# Altium PCB Cabinet_Device.PcbDoc (part 2 of 4)
Units mil, origin at the board's own origin, x right, y up, seen from the top; angles counter-clockwise.
Board outline 17790 x 10695 mil, 4 copper layers (Top Layer, Ground, Internal Plane 1, Bottom Layer), stack 30.634 mil thick; 515 components, 346 nets, 1467 pads, 176 vias.
Unrouted connection lines stored in the file: 677.
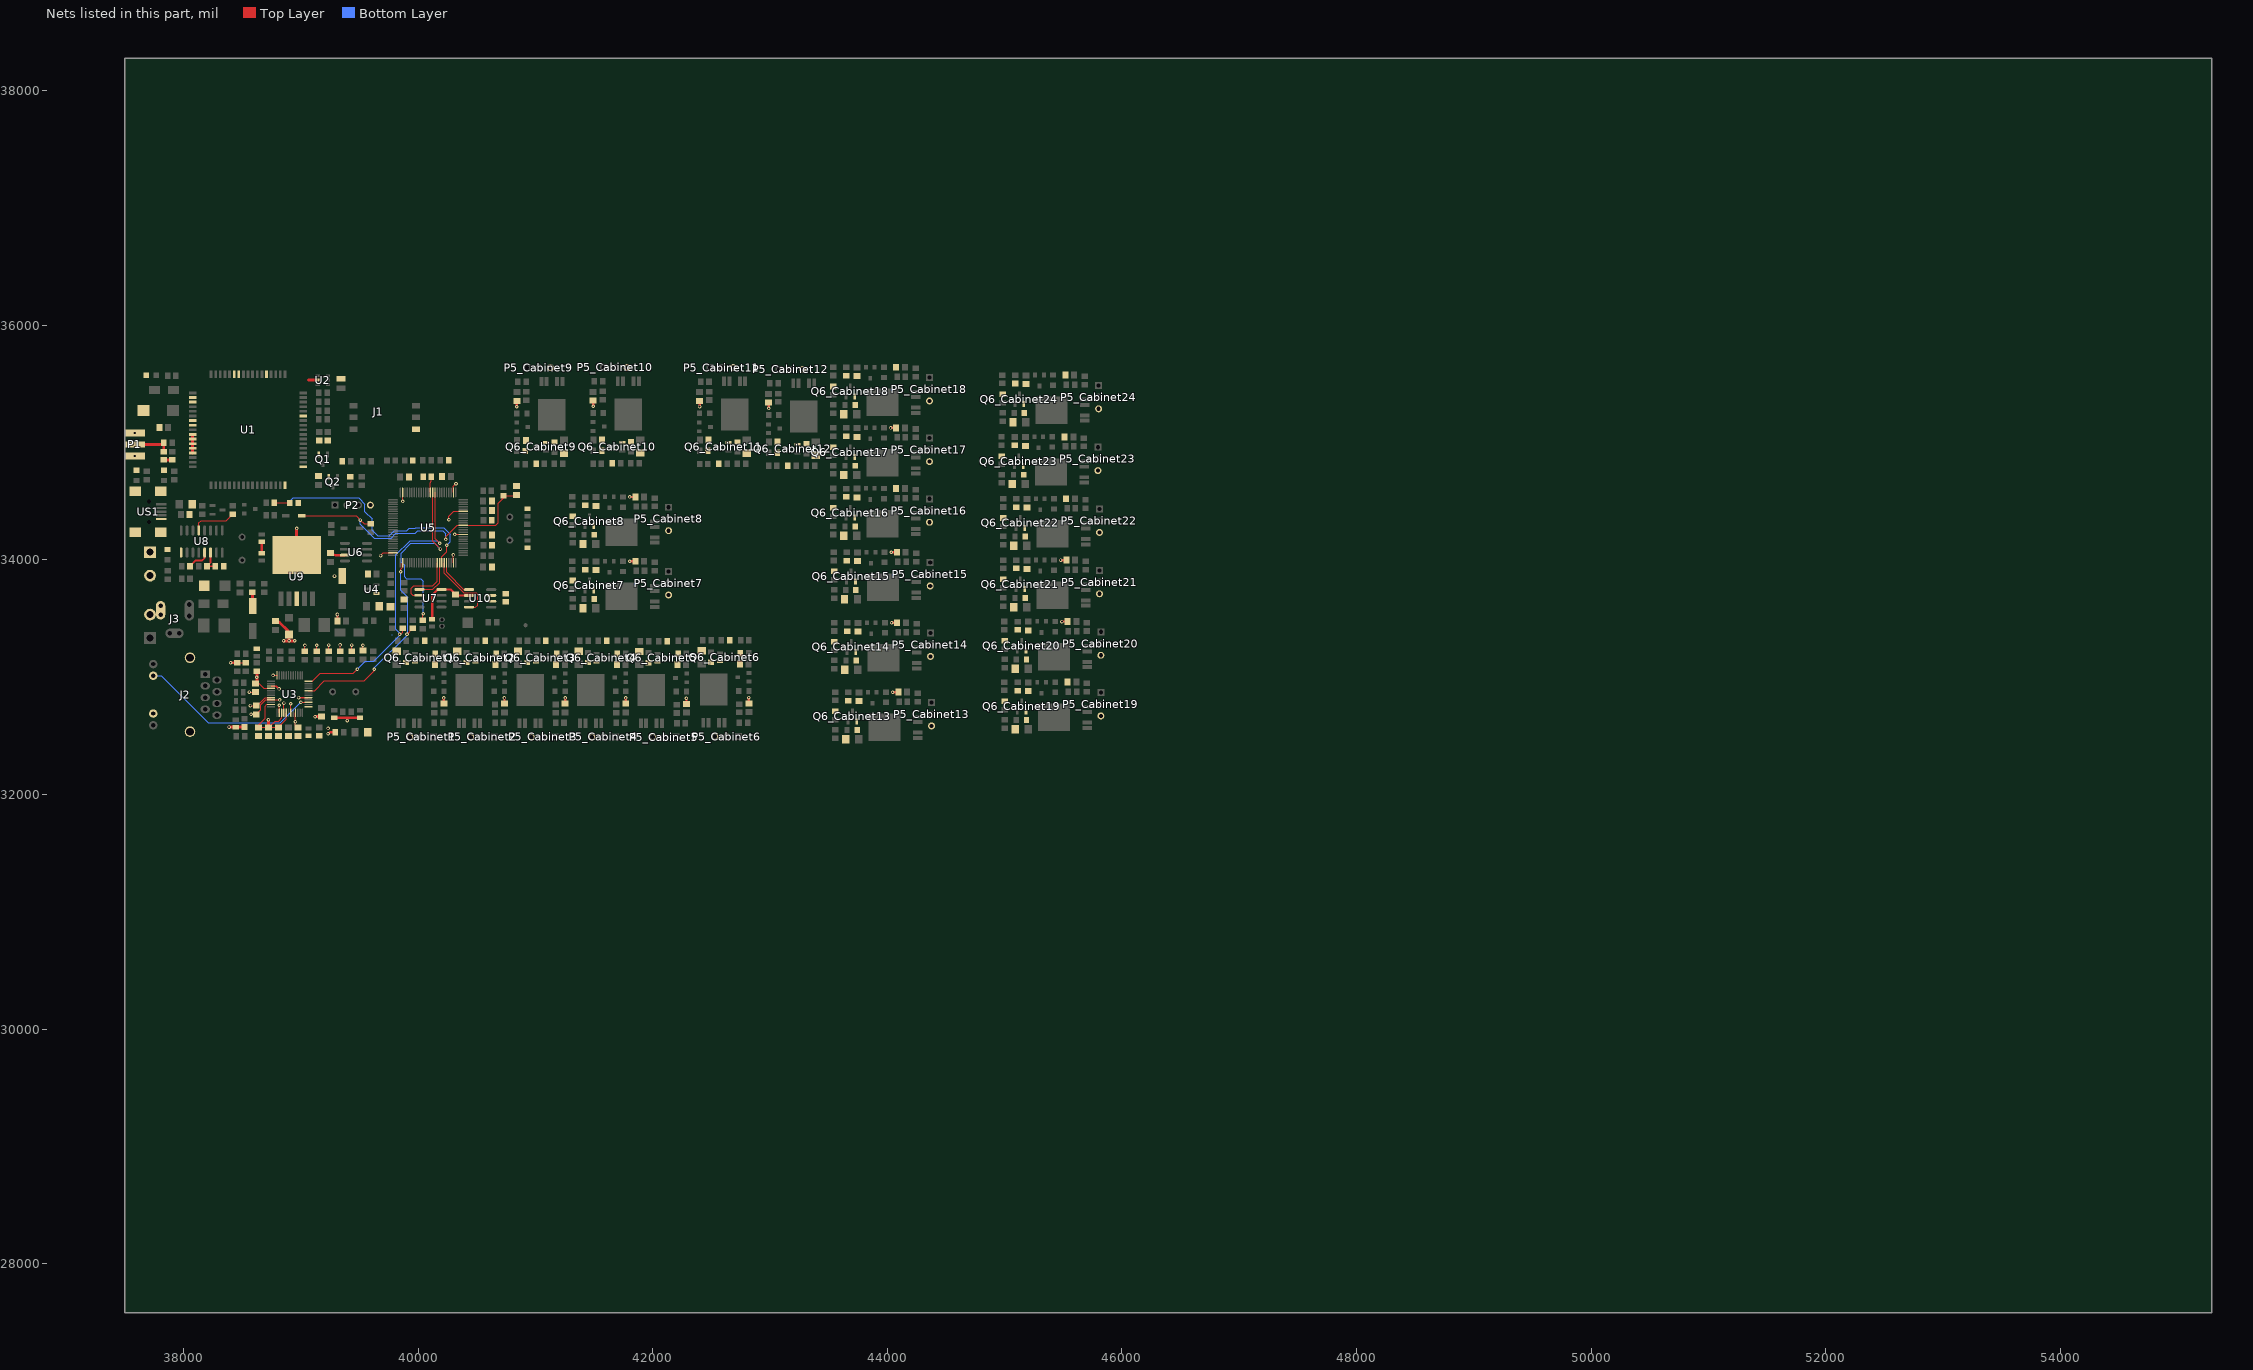
[diagram p4: the nets of this part, all layers, seen from the top]

## Components (designator, comment, footprint, x,y, rotation, side; value= is the part's Value field where it differs from the comment) (continued)
R62_Cabinet12 "1K 1% 0805(2012)" 2012[0805]R 43345,34803.51 r0 top (schematic designator R62)
R62_Cabinet13 "1K 1% 0805(2012)" 2012[0805]R 43558.02,32514.76 r270 top (schematic designator R62)
R62_Cabinet14 "1K 1% 0805(2012)" 2012[0805]R 43549,33107 r270 top (schematic designator R62)
R62_Cabinet15 "1K 1% 0805(2012)" 2012[0805]R 43546.51,33708 r270 top (schematic designator R62)
R62_Cabinet16 "1K 1% 0805(2012)" 2012[0805]R 43540.51,34251 r270 top (schematic designator R62)
R62_Cabinet17 "1K 1% 0805(2012)" 2012[0805]R 43540.51,34768 r270 top (schematic designator R62)
R62_Cabinet18 "1K 1% 0805(2012)" 2012[0805]R 43540.51,35285 r270 top (schematic designator R62)
R62_Cabinet19 "1K 1% 0805(2012)" 2012[0805]R 45001.51,32600 r270 top (schematic designator R62)
R62_Cabinet20 "1K 1% 0805(2012)" 2012[0805]R 45001.51,33117 r270 top (schematic designator R62)
R62_Cabinet21 "1K 1% 0805(2012)" 2012[0805]R 44990,33641 r270 top (schematic designator R62)
R62_Cabinet22 "1K 1% 0805(2012)" 2012[0805]R 44989.51,34164 r270 top (schematic designator R62)
R62_Cabinet23 "1K 1% 0805(2012)" 2012[0805]R 44976.51,34691 r270 top (schematic designator R62)
R62_Cabinet24 "1K 1% 0805(2012)" 2012[0805]R 44982.51,35218 r270 top (schematic designator R62)
R63_Cabinet1 "10K 1% 0805(2012)" 2012[0805]R 40020,33309 r180 top (schematic designator R63)
R63_Cabinet2 "10K 1% 0805(2012)" 2012[0805]R 40537,33309 r180 top (schematic designator R63)
R63_Cabinet3 "10K 1% 0805(2012)" 2012[0805]R 41054,33309 r180 top (schematic designator R63)
R63_Cabinet4 "10K 1% 0805(2012)" 2012[0805]R 41571,33309 r180 top (schematic designator R63)
R63_Cabinet5 "10K 1% 0805(2012)" 2012[0805]R 42088,33307.49 r180 top (schematic designator R63)
R63_Cabinet6 "10K 1% 0805(2012)" 2012[0805]R 42620,33312.49 r180 top (schematic designator R63)
R63_Cabinet7 "10K 1% 0805(2012)" 2012[0805]R 41316.51,33788 r270 top (schematic designator R63)
R63_Cabinet8 "10K 1% 0805(2012)" 2012[0805]R 41316.51,34336 r270 top (schematic designator R63)
R63_Cabinet9 "10K 1% 0805(2012)" 2012[0805]R 41041,34818.51 r0 top (schematic designator R63)
R63_Cabinet10 "10K 1% 0805(2012)" 2012[0805]R 41692,34821.51 r0 top (schematic designator R63)
R63_Cabinet11 "10K 1% 0805(2012)" 2012[0805]R 42599,34819.51 r0 top (schematic designator R63)
R63_Cabinet12 "10K 1% 0805(2012)" 2012[0805]R 43188,34803.51 r0 top (schematic designator R63)
R63_Cabinet13 "10K 1% 0805(2012)" 2012[0805]R 43558.02,32671.76 r270 top (schematic designator R63)
R63_Cabinet14 "10K 1% 0805(2012)" 2012[0805]R 43549,33264 r270 top (schematic designator R63)
R63_Cabinet15 "10K 1% 0805(2012)" 2012[0805]R 43546.51,33865 r270 top (schematic designator R63)
R63_Cabinet16 "10K 1% 0805(2012)" 2012[0805]R 43540.51,34408 r270 top (schematic designator R63)
R63_Cabinet17 "10K 1% 0805(2012)" 2012[0805]R 43540.51,34925 r270 top (schematic designator R63)
R63_Cabinet18 "10K 1% 0805(2012)" 2012[0805]R 43540.51,35442 r270 top (schematic designator R63)
R63_Cabinet19 "10K 1% 0805(2012)" 2012[0805]R 45001.51,32757 r270 top (schematic designator R63)
R63_Cabinet20 "10K 1% 0805(2012)" 2012[0805]R 45001.51,33274 r270 top (schematic designator R63)
R63_Cabinet21 "10K 1% 0805(2012)" 2012[0805]R 44990,33798 r270 top (schematic designator R63)
R63_Cabinet22 "10K 1% 0805(2012)" 2012[0805]R 44989.51,34321 r270 top (schematic designator R63)
R63_Cabinet23 "10K 1% 0805(2012)" 2012[0805]R 44976.51,34848 r270 top (schematic designator R63)
R63_Cabinet24 "10K 1% 0805(2012)" 2012[0805]R 44982.51,35375 r270 top (schematic designator R63)
TP1 "TP" TP 40917,33442 r90 top
U1 "SIM900" GSM_900A 38550,35107.91 r90 top
U2 "SMS05CT1G" ONSC-TSOP-6-318G-02_V 39188,35532 r0 top
U3 "W5500" LQFP48_N 38905.43,32855 r0 top
U4 "AS1360-33-T" SOT23_N 39605,33750 r90 top
U5 "STM32F103VET6TR" STM-LQFP100_M 40085,34275 r180 top
U6 "MAX706TESA" SOIC8_N 39470,34065 r0 top
U7 "PCF8563" SOIC8_N 40105,33672 r180 top
U8 "CH340G" SOIC16_N 38155,34156 r90 top
U9 "LM2596S-5.0" TS5B_N 38965,33905 r90 top
U10 "TJA1051T/3" SOIC8_N 40529,33671 r0 top
U11_Cabinet1 "BTS6143D" INF-PG-TO252-5-11_M 39920.43,32796.51 r90 top (schematic designator U11)
U11_Cabinet2 "BTS6143D" INF-PG-TO252-5-11_M 40437.43,32796.51 r90 top (schematic designator U11)
U11_Cabinet3 "BTS6143D" INF-PG-TO252-5-11_M 40954.43,32796.51 r90 top (schematic designator U11)
U11_Cabinet4 "BTS6143D" INF-PG-TO252-5-11_M 41471.43,32796.51 r90 top (schematic designator U11)
U11_Cabinet5 "BTS6143D" INF-PG-TO252-5-11_M 41988.43,32795 r90 top (schematic designator U11)
U11_Cabinet6 "BTS6143D" INF-PG-TO252-5-11_M 42520.43,32800 r90 top (schematic designator U11)
U11_Cabinet7 "BTS6143D" INF-PG-TO252-5-11_M 41829,33688.43 r180 top (schematic designator U11)
U11_Cabinet8 "BTS6143D" INF-PG-TO252-5-11_M 41829,34236.43 r180 top (schematic designator U11)
U11_Cabinet9 "BTS6143D" INF-PG-TO252-5-11_M 41140.57,35331 r270 top (schematic designator U11)
U11_Cabinet10 "BTS6143D" INF-PG-TO252-5-11_M 41791.57,35334 r270 top (schematic designator U11)
U11_Cabinet11 "BTS6143D" INF-PG-TO252-5-11_M 42698.57,35332 r270 top (schematic designator U11)
U11_Cabinet12 "BTS6143D" INF-PG-TO252-5-11_M 43287.57,35316 r270 top (schematic designator U11)
U11_Cabinet13 "BTS6143D" INF-PG-TO252-5-11_M 44070.51,32572.2 r180 top (schematic designator U11)
U11_Cabinet14 "BTS6143D" INF-PG-TO252-5-11_M 44061.49,33164.43 r180 top (schematic designator U11)
U11_Cabinet15 "BTS6143D" INF-PG-TO252-5-11_M 44059,33765.43 r180 top (schematic designator U11)
U11_Cabinet16 "BTS6143D" INF-PG-TO252-5-11_M 44053,34308.43 r180 top (schematic designator U11)
U11_Cabinet17 "BTS6143D" INF-PG-TO252-5-11_M 44053,34825.43 r180 top (schematic designator U11)
U11_Cabinet18 "BTS6143D" INF-PG-TO252-5-11_M 44053,35342.43 r180 top (schematic designator U11)
U11_Cabinet19 "BTS6143D" INF-PG-TO252-5-11_M 45514,32657.43 r180 top (schematic designator U11)
U11_Cabinet20 "BTS6143D" INF-PG-TO252-5-11_M 45514,33174.43 r180 top (schematic designator U11)
U11_Cabinet21 "BTS6143D" INF-PG-TO252-5-11_M 45502.49,33698.43 r180 top (schematic designator U11)
U11_Cabinet22 "BTS6143D" INF-PG-TO252-5-11_M 45502,34221.43 r180 top (schematic designator U11)
U11_Cabinet23 "BTS6143D" INF-PG-TO252-5-11_M 45489,34748.43 r180 top (schematic designator U11)
U11_Cabinet24 "BTS6143D" INF-PG-TO252-5-11_M 45495,35275.43 r180 top (schematic designator U11)
US1 "USB-B" USB/SM0.8-6H5 37500,34410 r180 top
X1 "32.768KHz" XTAL32 40203,33490 r0 top
Y1 "8MHz" XTAL_HC-49 39370,32875 r0 top
Y2 "8MHz" XTAL_HC-49 40782,34266 r90 top
Y3 "12MHz" XTAL_HC-49 38500,34095 r90 top

## Footprints (in the part's own frame and the unit in brackets; to place one, negate y for a bottom-side part, rotate by r counter-clockwise, add the part's x,y. Pads: shape width x height; smd on the part's side, far side on the other; paste and mask are expansions set on the pad)
2EDGR-5.08-2P [mil]
  rect 100x100 hole 60: 1(0,0)
  round 100 hole 60: 2(200,0)
  silkscreen extent -100,-415 300,63
0805LED [mil]
  rect 45x50 smd: 1(-43.5,0) 2(43.5,0)
  silkscreen extent -5,-20 10,20, body extent -41,-18 41,18, height 33
2012[0805] [mm] "Chip  Body 2.0x1.3mm, IPC Medium Density"
  rect 1.2x1.4 smd: 1(-0.9,0) 2(0.9,0)
  body extent -1.07,-0.7 1.07,0.7, height 0.65
2012[0805]06CD [mm] "Chip Capacitor; Body 2.0 x 1.2 mm (LxW typ)"
  rect 1.3x1.5 smd: 1(-0.95,0) 2(0.95,0)
  silkscreen extent -2.16,-0.64 -2.16,0.63, body extent -1.51,-0.7 1.49,0.7, height 0.53
2012[0805]13CD [mm] "Chip Capacitor; Body 2.0 x 1.2 mm (LxW typ)"
  rect 1.3x1.5 smd: 1(-0.95,0) 2(0.95,0)
  silkscreen extent -1.9,-0.65 -1.9,0.65
2012[0805]100_L [mm] "Chip Capacitor, Body 2.0x1.2mm, Height 1.0mm, IPC High Density"
  rect 0.95x1.35 smd: 1(-0.8,0) 2(0.8,0)
  silkscreen extent -0.05,-0.58 0.05,0.58, body extent -1.1,-0.72 1.1,0.72, height 1
2012[0805]R [mm] "Chip Resistor, Body 2.0x1.3mm, IPC Medium Density"
  rect 1.2x1.4 smd: 1(-0.9,0) 2(0.9,0)
  silkscreen extent 0,-0.6 0,0.6, body extent -1.07,-0.7 1.07,0.7, height 0.65
2012[0805]RL [mm] "Chip Resistor, Body 2.0x1.3mm, IPC Medium Density"
  rect 1.2x1.4 smd: 1(-0.9,0) 2(0.9,0)
  silkscreen extent -0.1,-0.6 0.1,0.6, body extent -1.07,-0.7 1.07,0.7, height 0.65
3216[1206]CB [mm]
  rect 1.6x1.8 smd: 1(-1.4,0) 2(1.4,0)
  silkscreen extent -0.3,-0.8 0.3,0.8, body extent -2.1,-0.9 2.1,0.9, height 0.95
7343[2917]CT [mm] "Capacitor, SM Tantalum; Body 7.3 x 4.3 mm (LxW typ)"
  rect 2.6x2.4 smd: 1(-3.2,0) 2(3.2,0)
  silkscreen extent -4.58,-2.3 3.8,2.42
DO-214AA/SMB [mm] "DO-214-AA/SMB; 2 C-Bend Leads; Body 5.3 x 3.6 mm, inc. leads (LxW)"
  rect 2.3x2.3 smd: 1(-2.25,0) 2(2.25,0)
  silkscreen extent -2.16,-1.8 2.16,1.78, body extent -2.7,-1.8 2.7,1.8, height 2.27
DO-214AC/SMA [mm] "DO-214-AC/SMA; 2 C-Bend Leads; Body 5 x 2.7 mm, inc. leads (LxW)"
  rect 2.4x1.8 smd: 1(-2.05,0) 2(2.05,0)
  silkscreen extent -1.91,-1.27 1.91,1.27, body extent -2.6,-1.3 2.6,1.3, height 2.38
GSM_900A [mm]
  rect 1.6x0.6 smd: 1(-12,8) 2(-12,7) 3(-12,6) 4(-12,5) 5(-12,4) 6(-12,3) 7(-12,2) 8(-12,1) 9(-12,0) 10(-12,-1) 11(-12,-2) 12(-12,-3) 13(-12,-4) 14(-12,-5) 15(-12,-6) 16(-12,-7) 17(-12,-8) 35(12,-8) 36(12,-7) 37(12,-6) 38(12,-5) 39(12,-4) 40(12,-3) 41(12,-2) 42(12,-1) 43(12,0) 44(12,1) 45(12,2) 46(12,3) 47(12,4) 48(12,5) 49(12,6) 50(12,7) 51(12,8)
  rect 0.6x1.6 smd: 18(-8,-12) 19(-7,-12) 20(-6,-12) 21(-5,-12) 22(-4,-12) 23(-3,-12) 24(-2,-12) 25(-1,-12) 26(0,-12) 27(1,-12) 28(2,-12) 29(3,-12) 30(4,-12) 31(5,-12) 32(6,-12) 33(7,-12) 34(8,-12) 52(8,12) 53(7,12) 54(6,12) 55(5,12) 56(4,12) 57(3,12) 58(2,12) 59(1,12) 60(0,12) 61(-1,12) 62(-2,12) 63(-3,12) 64(-4,12) 65(-5,12) 66(-6,12) 67(-7,12) 68(-8,12)
  silkscreen extent -13.75,-12 12,12
HDR1X3 [mm] "Connector; Header; 3 Position"
  rect 1.5x1.5 hole 0.9: 1(0,0)
  round 1.5 hole 0.9: 2(2.54,0) 3(5.08,0)
  silkscreen extent -1.27,-1.27 6.35,1.27
HDR1X4 [mm] "Connector; Header; 4 Position"
  rect 1.5x1.5 hole 0.9: 1(0,0)
  round 1.5 hole 0.9: 2(2.54,0) 3(5.08,0) 4(7.62,0)
  silkscreen extent -1.27,-1.27 8.89,1.27
HR911105A [mil] "HR911105A"
  rect 80x62 hole 40: 1(-429,-159)
  oval 80x62 hole 40: 2(-529,-109) 3(-429,-59) 4(-529,-9) 5(-429,41) 6(-529,91) 7(-429,141) 8(-529,191)
  round 72 hole 36: 9(13.91,-244.63) 10(13.91,-145) 11(13.91,176.87) 12(13.91,277)
  round 90 hole 65: 13(-299.08,331.16) 13(-299.08,-298.76)
  Multi-Layer circle w5: c-169,-209 r70.8
  Multi-Layer circle w5: c-169,241 r70.8
  silkscreen extent -608,-299 258,331
INDP5050X28N [mm]
  rect 2.5x3 smd: 1(-2.2,0) 2(2.2,0)
  silkscreen extent -2.6,-2.6 2.6,2.6, body extent -1.56,-1.53 1.51,1.54, height 2
INF-PG-TO252-5-11_M [mm] "DPAK, 5-Leads, Body 6.5x6.12mm, Pitch 1.14mm, IPC Low Density"
  rect 2.05x0.85 smd: 1(-4.8,2.28) 2(-4.8,1.14) 4(-4.8,-1.14) 5(-4.8,-2.28)
  rect 6.9x5.95 smd: 3(2.4,0)
  silkscreen extent -4.92,-3.35 -1.45,3.38, body extent -2.05,-3.32 4.17,3.32, height 2.35
KLD-0202 [mm] "DC Power Jack, 2.5mm, KLD Series, PCB Mount"
  oval 2x4.5 all layers, no hole: 1(13.7,0)
  round 1.5 hole 1: 1A(13.7,-1.25) 1B(13.7,1.25) 2A(7.5,-1) 2B(7.5,1) 3A(9.5,-5) 3B(11.5,-5)
  oval 2x4 all layers, no hole: 2(7.5,0)
  oval 4x2 all layers, no hole: 3(10.5,-5)
  silkscreen extent 0,-4.5 14.6,4.5
LQFP48_N [mm] "Thin QFP, 48-Leads, Body 7x7mm, Pitch 0.5mm, IPC Medium Density"
  oval 1.8x0.3 smd: 1(-4.05,2.75) 2(-4.05,2.25) 3(-4.05,1.75) 4(-4.05,1.25) 5(-4.05,0.75) 6(-4.05,0.25) 7(-4.05,-0.25) 8(-4.05,-0.75) 9(-4.05,-1.25) 10(-4.05,-1.75) 11(-4.05,-2.25) 12(-4.05,-2.75) 25(4.05,-2.75) 26(4.05,-2.25) 27(4.05,-1.75) 28(4.05,-1.25) 29(4.05,-0.75) 30(4.05,-0.25) 31(4.05,0.25) 32(4.05,0.75) 33(4.05,1.25) 34(4.05,1.75) 35(4.05,2.25) 36(4.05,2.75)
  oval 0.3x1.8 smd: 13(-2.75,-4.05) 14(-2.25,-4.05) 15(-1.75,-4.05) 16(-1.25,-4.05) 17(-0.75,-4.05) 18(-0.25,-4.05) 19(0.25,-4.05) 20(0.75,-4.05) 21(1.25,-4.05) 22(1.75,-4.05) 23(2.25,-4.05) 24(2.75,-4.05) 37(2.75,4.05) 38(2.25,4.05) 39(1.75,4.05) 40(1.25,4.05) 41(0.75,4.05) 42(0.25,4.05) 43(-0.25,4.05) 44(-0.75,4.05) 45(-1.25,4.05) 46(-1.75,4.05) 47(-2.25,4.05) 48(-2.75,4.05)
  silkscreen extent -4.17,-2.75 2.75,3.57, body extent -3.5,-3.5 3.5,3.5, height 1.6
NIC-CAPA2-6.3X5.8_V [mm] "Aluminum Electrolytic Capacitor, Diameter 6.3mm, Height 6.1mm, Pitch 5.4mm"
  rect 3.5x1.6 smd: 1(-2.7,0) 2(2.7,0)
  silkscreen extent -3.4,-3.4 3.4,3.4, body extent -3.14,-3.12 3.14,3.15, height 6.1
NIC-CAPA2-6.3X7.7_V [mm] "Aluminum Electrolytic Capacitor, Diameter 6.3mm, Height 8mm, Pitch 5.4mm"
  rect 3.5x1.6 smd: 1(-2.7,0) 2(2.7,0)
  silkscreen extent -3.4,-3.4 3.4,3.4, body extent -3.14,-3.12 3.14,3.15, height 8
ONSC-TSOP-6-318G-02_V [mm] "SOP, 6-Leads, Body 3x1.5mm, Pitch 0.95mm"
  rect 0.95x0.6 smd: 1(-1.125,0.95) 2(-1.125,0) 3(-1.125,-0.95) 4(1.125,-0.95) 5(1.125,0) 6(1.125,0.95)
  silkscreen extent -1.25,-1.5 0.25,1.92, body extent -0.75,-1.5 0.75,1.5, height 1.1
Power-2P [mil]
  rect 100x100 hole 60: 1(0,0)
  round 100 hole 60: 2(200,0)
  silkscreen extent -100,-63 300,63
SIM_MUP-C745 [mm]
  rect 1.2x1.7 smd: 1(0,0) 2(2.54,0) 3(5.08,0) 5(0,-13.5) 6(2.54,-13.5) 7(5.08,-13.5)
  oval 1.2x1.7 on Top Overlay: 3(-3.429,1.397)
  rect 1.2x2 smd: 4(8.88,2.75) 8(10.88,2.75)
  silkscreen extent -4.5,-22.75 12.32,3.3
SMA-2 [mm]
  rect 4.5x1.2 smd: 1(0,0)
  rect 4.5x1.524 hole 0.5: 2(0,-2.5) 2(0,2.5)
  silkscreen extent -11.8,-3.3 -2.3,3.3
SOD123 [mm] "SOD-123; 2 Leads; Body 2.7 x 1.6 mm, (LxW)"
  rect 1.6x0.8 smd: 1(-1.7,0) 2(1.7,0)
  silkscreen extent -1.45,-0.85 1.45,0.85
SOIC8_N [mm] "SOIC, 8-Leads, Body 4.9x3.9mm, Pitch 1.27mm, IPC Medium Density"
  oval 2.2x0.6 smd: 1(-2.4,1.905) 2(-2.4,0.635) 3(-2.4,-0.635) 4(-2.4,-1.905) 5(2.4,-1.905) 6(2.4,-0.635) 7(2.4,0.635) 8(2.4,1.905)
  silkscreen extent -2.52,-2.5 0.9,2.88, body extent -3,-2.45 3,2.45, height 1.7
SOIC16_N [mm] "SOIC, 16-Leads, Body 9.9x3.9mm, Pitch 1.27mm, IPC Medium Density"
  oval 2.2x0.6 smd: 1(-2.4,4.445) 2(-2.4,3.175) 3(-2.4,1.905) 4(-2.4,0.635) 5(-2.4,-0.635) 6(-2.4,-1.905) 7(-2.4,-3.175) 8(-2.4,-4.445) 9(2.4,-4.445) 10(2.4,-3.175) 11(2.4,-1.905) 12(2.4,-0.635) 13(2.4,0.635) 14(2.4,1.905) 15(2.4,3.175) 16(2.4,4.445)
  silkscreen extent -2.52,-5 0.9,5.42, body extent -2,-5 2,5, height 1.75
SOT23_N [mm] "SOT23, 3-Leads, Body 2.9x1.3mm, Pitch 0.95mm, Lead Span 2.3mm, IPC Medium Density"
  rect 0.6x1.3 smd: 1(-0.95,-1.05) 2(0.95,-1.05) 3(0,1.05)
  silkscreen extent -1.93,-1.17 1.5,0.7, body extent -1.5,-0.7 1.5,0.7, height 1.1
SOT23B_N [mm] "SOT-23; 3 Leads; Body 3.0 x 2.5 mm, inc. leads (LxW max)"
  rect 0.85x1 smd: 1(-0.95,-1.2) 2(0.95,-1.2) 3(0,1.2)
  silkscreen extent -2.05,-1.32 1.28,1.2
STM-LQFP100_M [mm] "Thin QFP, 100-Leads, Body 14x14mm, Pitch 0.5mm, IPC Low Density"
  oval 2.1x0.3 smd: 1(-7.6,6) 2(-7.6,5.5) 3(-7.6,5) 4(-7.6,4.5) 5(-7.6,4) 6(-7.6,3.5) 7(-7.6,3) 8(-7.6,2.5) 9(-7.6,2) 10(-7.6,1.5) 11(-7.6,1) 12(-7.6,0.5) 13(-7.6,0) 14(-7.6,-0.5) 15(-7.6,-1) 16(-7.6,-1.5) 17(-7.6,-2) 18(-7.6,-2.5) 19(-7.6,-3) 20(-7.6,-3.5) 21(-7.6,-4) 22(-7.6,-4.5) 23(-7.6,-5) 24(-7.6,-5.5) 25(-7.6,-6) 51(7.6,-6) 52(7.6,-5.5) 53(7.6,-5) 54(7.6,-4.5) 55(7.6,-4) 56(7.6,-3.5) 57(7.6,-3) 58(7.6,-2.5) 59(7.6,-2) 60(7.6,-1.5) 61(7.6,-1) 62(7.6,-0.5) 63(7.6,0) 64(7.6,0.5) 65(7.6,1) 66(7.6,1.5) 67(7.6,2) 68(7.6,2.5) 69(7.6,3) 70(7.6,3.5) 71(7.6,4) 72(7.6,4.5) 73(7.6,5) 74(7.6,5.5) 75(7.6,6)
  oval 0.3x2.1 smd: 26(-6,-7.6) 27(-5.5,-7.6) 28(-5,-7.6) 29(-4.5,-7.6) 30(-4,-7.6) 31(-3.5,-7.6) 32(-3,-7.6) 33(-2.5,-7.6) 34(-2,-7.6) 35(-1.5,-7.6) 36(-1,-7.6) 37(-0.5,-7.6) 38(0,-7.6) 39(0.5,-7.6) 40(1,-7.6) 41(1.5,-7.6) 42(2,-7.6) 43(2.5,-7.6) 44(3,-7.6) 45(3.5,-7.6) 46(4,-7.6) 47(4.5,-7.6) 48(5,-7.6) 49(5.5,-7.6) 50(6,-7.6) 76(6,7.6) 77(5.5,7.6) 78(5,7.6) 79(4.5,7.6) 80(4,7.6) 81(3.5,7.6) 82(3,7.6) 83(2.5,7.6) 84(2,7.6) 85(1.5,7.6) 86(1,7.6) 87(0.5,7.6) 88(0,7.6) 89(-0.5,7.6) 90(-1,7.6) 91(-1.5,7.6) 92(-2,7.6) 93(-2.5,7.6) 94(-3,7.6) 95(-3.5,7.6) 96(-4,7.6) 97(-4.5,7.6) 98(-5,7.6) 99(-5.5,7.6) 100(-6,7.6)
  silkscreen extent -7.73,-6.15 6.15,6.82, body extent -7,-7 7,7, height 1.6
TP [mil] "Test Point 30mil-35mil"
  round 35 smd: 1(0,0)
TS5B_N [mm]
  rect 3.2x1.05 smd: 1(-6,3.4) 2(-6,1.7) 3(-6,0) 4(-6,-1.7) 5(-6,-3.4)
  rect 8.3x10.45 smd: 6(3.45,0)
  silkscreen extent -6.12,-5.2 -1.1,5.2, body extent -3.35,-5.2 6.05,5.2, height 4.65
USB/SM0.8-6H5 [mm] "Connector; USB2.0, Type B, SM; 5 Position; Right Angle"
  rect 2.3x0.5 smd: 1(-7.85,-1.6) 2(-7.85,-0.8) 3(-7.85,0) 4(-7.85,0.8) 5(-7.85,1.6)
  rect 2.5x2 smd: MH1(-7.75,4.45) MH2(-2.25,4.45) MH3(-7.75,-4.45) MH4(-2.25,-4.45)
  round 0.6 hole 0.9 unplated: ""(-5.25,-2.2) ""(-5.25,2.2)
  silkscreen extent -9.68,-4.95 0.7,4.95, body extent -8.9,-4.95 0.7,4.95, height 3.9
VISH-DO-214AC-2_V [mm] "SMA, 2-Leads, Body 4.245x2.665mm, Height 2.29mm"
  rect 1.7x1.68 smd: 1(-1.79,0) 2(1.79,0)
  silkscreen extent -2.12,-1.33 2.12,2.06, body extent -2.57,-1.33 2.57,1.33, height 2.29
XTAL32 [mil]
  oval 50x40 hole 28: 1(0,0) 2(0,-56)
  rect 92.13x86 smd: ""(220,-27)
  silkscreen extent -28,-77 264,25
XTAL_HC-49 [mil]
  round 60 hole 32: 1(-98.5,0) 2(98.5,0)
  silkscreen extent -222,-93 228,88, body extent -220,-94 227,89, height 138

## Part data
C1 C2: library part C
C3: library part CAP
C4 C5 C6 C7 C8 C9 C10 C11 C12 C13 C22 C24 C25 C26 C27 C28 C29 C30 C31 C35 C38 C42 C44 C45 C47_Cabinet1 C47_Cabinet2 C47_Cabinet3 C47_Cabinet4 C47_Cabinet5 C47_Cabinet6 C47_Cabinet7 C47_Cabinet8 C47_Cabinet9 C47_Cabinet10 C47_Cabinet11 C47_Cabinet12 C47_Cabinet13 C47_Cabinet14 C47_Cabinet15 C47_Cabinet16 C47_Cabinet17 C47_Cabinet18 C47_Cabinet19 C47_Cabinet20 C47_Cabinet21 C47_Cabinet22 C47_Cabinet23 C47_Cabinet24 C48_Cabinet1 C48_Cabinet2 C48_Cabinet3 C48_Cabinet4 C48_Cabinet5 C48_Cabinet6 C48_Cabinet7 C48_Cabinet8 C48_Cabinet9 C48_Cabinet10 C48_Cabinet11 C48_Cabinet12 C48_Cabinet13 C48_Cabinet14 C48_Cabinet15 C48_Cabinet16 C48_Cabinet17 C48_Cabinet18 C48_Cabinet19 C48_Cabinet20 C48_Cabinet21 C48_Cabinet22 C48_Cabinet23 C48_Cabinet24: library part CMP-1036-04418-1, "CAP 100nF 50V ±5% 0805 (2012 Metric) Thickness 1mm SMD"
C14 C32 C37: library part CMP-1036-04417-1, "CAP 100nF 50V ±5% 0805 (2012 Metric) Thickness 1.45mm SMD"
C15 C16 C33 C34 C36 C39 C40: library part CMP-1036-01136-1, "CAP 18pF 50V ±1% 0805 (2012 Metric) Thickness 0.75mm SMD"
C17 C23: library part CMP-1036-03837-1, "CAP 10nF 50V ±1% 0805 (2012 Metric) Thickness 1mm SMD"
C18: library part CMP-1036-04900-1, "CAP 4.7uF 50V ±10% 0805 (2012 Metric) Thickness 1.45mm SMD"
C19: library part CMP-1036-04061-1, "CAP 22nF 50V ±5% 0805 (2012 Metric) Thickness 1.2mm SMD"
C20 C21: library part CMP-1036-03703-1, "CAP 6.8nF 50V ±1% 0805 (2012 Metric) Thickness 1mm SMD"
C41: library part CMP-0687-00054-1, "Aluminum Electrolytic Capacitor, UD Series, Low Impedance, 100 uF, 10 V, + / - 20%, -55 to 105 degC, Chip Type, 6.3 x 5.8 mm D x L, Pb-Free, Reel"
C43: library part CMP-0687-00063-1, "Aluminum Electrolytic Capacitor, UD Series, Low Impedance, 100 uF, 25 V, + / - 20%, -55 to 105 degC, Chip Type, 6.3 x 7.7 mm D x L, Pb-Free, Reel"
C46: library part CAP, "Capacitor"
CP1 CP2 CP3 CP4 CP5_Cabinet1 CP5_Cabinet2 CP5_Cabinet3 CP5_Cabinet4 CP5_Cabinet5 CP5_Cabinet6 CP5_Cabinet7 CP5_Cabinet8 CP5_Cabinet9 CP5_Cabinet10 CP5_Cabinet11 CP5_Cabinet12 CP5_Cabinet13 CP5_Cabinet14 CP5_Cabinet15 CP5_Cabinet16 CP5_Cabinet17 CP5_Cabinet18 CP5_Cabinet19 CP5_Cabinet20 CP5_Cabinet21 CP5_Cabinet22 CP5_Cabinet23 CP5_Cabinet24: library part CAPACITOR, "钽质电容器-固体SMD 16volts 10uF 10%"
D1 D4 D5: "1.0 Ampere General Purpose Rectifier"
D2: library part 1N4148W, "二极管 - 通用，功率，开关 100V Io/150mA"
D3: library part 1N4148, "高速开关二极管"
D6: library part 30BQ040, "TVS"
D7: library part CMP-0549-00004-1, "Schottky Barrier Rectifier, 40 V Maximum DC Blocking Voltage, -65 to 125 degC, 2-Pin SMA Case, RoHS"
J1: library part SIMCARD, "CON"
J2: library part HR911102
J3: "Low Voltage Power Supply Connector"
L1 L2: library part Inductor, "固定电感器 SMD Power Inductor"
LED1 LED2 LED3 LED4: library part LED-RED, "红色LED"
LED5_Cabinet1 LED5_Cabinet2 LED5_Cabinet3 LED5_Cabinet4 LED5_Cabinet5 LED5_Cabinet6 LED5_Cabinet7 LED5_Cabinet8 LED5_Cabinet9 LED5_Cabinet10 LED5_Cabinet11 LED5_Cabinet12 LED5_Cabinet13 LED5_Cabinet14 LED5_Cabinet15 LED5_Cabinet16 LED5_Cabinet17 LED5_Cabinet18 LED5_Cabinet19 LED5_Cabinet20 LED5_Cabinet21 LED5_Cabinet22 LED5_Cabinet23 LED5_Cabinet24 LED6_Cabinet1 LED6_Cabinet2 LED6_Cabinet3 LED6_Cabinet4 LED6_Cabinet5 LED6_Cabinet6 LED6_Cabinet7 LED6_Cabinet8 LED6_Cabinet9 LED6_Cabinet10 LED6_Cabinet11 LED6_Cabinet12 LED6_Cabinet13 LED6_Cabinet14 LED6_Cabinet15 LED6_Cabinet16 LED6_Cabinet17 LED6_Cabinet18 LED6_Cabinet19 LED6_Cabinet20 LED6_Cabinet21 LED6_Cabinet22 LED6_Cabinet23 LED6_Cabinet24: library part LED
LR1 LR2 LR3 LR4 LR5 LR6 LR7 LR8: library part "Res Semi", "电磁干扰滤波珠子、扼流圈和阵列 Ferrite Chip Beads"
P1: "SMA-J-P-H-ST-TH1"
P2: "Header, 4-Pin"
P3 P4: "Header, 2-Pin"
P5_Cabinet1 P5_Cabinet2 P5_Cabinet3 P5_Cabinet4 P5_Cabinet5 P5_Cabinet6 P5_Cabinet7 P5_Cabinet8 P5_Cabinet9 P5_Cabinet10 P5_Cabinet11 P5_Cabinet12 P5_Cabinet13 P5_Cabinet14 P5_Cabinet15 P5_Cabinet16 P5_Cabinet17 P5_Cabinet18 P5_Cabinet19 P5_Cabinet20 P5_Cabinet21 P5_Cabinet22 P5_Cabinet23 P5_Cabinet24: "Header, 3-Pin"
Q1 Q2 Q3 Q6_Cabinet1 Q6_Cabinet2 Q6_Cabinet3 Q6_Cabinet4 Q6_Cabinet5 Q6_Cabinet6 Q6_Cabinet7 Q6_Cabinet8 Q6_Cabinet9 Q6_Cabinet10 Q6_Cabinet11 Q6_Cabinet12 Q6_Cabinet13 Q6_Cabinet14 Q6_Cabinet15 Q6_Cabinet16 Q6_Cabinet17 Q6_Cabinet18 Q6_Cabinet19 Q6_Cabinet20 Q6_Cabinet21 Q6_Cabinet22 Q6_Cabinet23 Q6_Cabinet24: "NPN Switching Transistor"
Q4 Q5_Cabinet1 Q5_Cabinet2 Q5_Cabinet3 Q5_Cabinet4 Q5_Cabinet5 Q5_Cabinet6 Q5_Cabinet7 Q5_Cabinet8 Q5_Cabinet9 Q5_Cabinet10 Q5_Cabinet11 Q5_Cabinet12 Q5_Cabinet13 Q5_Cabinet14 Q5_Cabinet15 Q5_Cabinet16 Q5_Cabinet17 Q5_Cabinet18 Q5_Cabinet19 Q5_Cabinet20 Q5_Cabinet21 Q5_Cabinet22 Q5_Cabinet23 Q5_Cabinet24: "PNP Switching Transistor"
R1 R40: library part RES, "厚膜电阻器 - SMD 1/10watt 120ohms 1%"
R2 R3 R4 R6 R9 R36 R39 R41 R47 R48 R49 R58_Cabinet1 R58_Cabinet2 R58_Cabinet3 R58_Cabinet4 R58_Cabinet5 R58_Cabinet6 R58_Cabinet7 R58_Cabinet8 R58_Cabinet9 R58_Cabinet10 R58_Cabinet11 R58_Cabinet12 R58_Cabinet13 R58_Cabinet14 R58_Cabinet15 R58_Cabinet16 R58_Cabinet17 R58_Cabinet18 R58_Cabinet19 R58_Cabinet20 R58_Cabinet21 R58_Cabinet22 R58_Cabinet23 R58_Cabinet24 R59_Cabinet1 R59_Cabinet2 R59_Cabinet3 R59_Cabinet4 R59_Cabinet5 R59_Cabinet6 R59_Cabinet7 R59_Cabinet8 R59_Cabinet9 R59_Cabinet10 R59_Cabinet11 R59_Cabinet12 R59_Cabinet13 R59_Cabinet14 R59_Cabinet15 R59_Cabinet16 R59_Cabinet17 R59_Cabinet18 R59_Cabinet19 R59_Cabinet20 R59_Cabinet21 R59_Cabinet22 R59_Cabinet23 R59_Cabinet24 R61_Cabinet1 R61_Cabinet2 R61_Cabinet3 R61_Cabinet4 R61_Cabinet5 R61_Cabinet6 R61_Cabinet7 R61_Cabinet8 R61_Cabinet9 R61_Cabinet10 R61_Cabinet11 R61_Cabinet12 R61_Cabinet13 R61_Cabinet14 R61_Cabinet15 R61_Cabinet16 R61_Cabinet17 R61_Cabinet18 R61_Cabinet19 R61_Cabinet20 R61_Cabinet21 R61_Cabinet22 R61_Cabinet23 R61_Cabinet24 R62_Cabinet1 R62_Cabinet2 R62_Cabinet3 R62_Cabinet4 R62_Cabinet5 R62_Cabinet6 R62_Cabinet7 R62_Cabinet8 R62_Cabinet9 R62_Cabinet10 R62_Cabinet11 R62_Cabinet12 R62_Cabinet13 R62_Cabinet14 R62_Cabinet15 R62_Cabinet16 R62_Cabinet17 R62_Cabinet18 R62_Cabinet19 R62_Cabinet20 R62_Cabinet21 R62_Cabinet22 R62_Cabinet23 R62_Cabinet24: library part CMP-1013-00510-1, "1K 0.125W 1% 0805 (2012 Metric)  SMD"
R5 R10 R17 R18 R19 R20 R21 R22 R23 R24 R25 R29 R37 R43 R44 R45 R46 R50 R54 R55 R56 R60_Cabinet1 R60_Cabinet2 R60_Cabinet3 R60_Cabinet4 R60_Cabinet5 R60_Cabinet6 R60_Cabinet7 R60_Cabinet8 R60_Cabinet9 R60_Cabinet10 R60_Cabinet11 R60_Cabinet12 R60_Cabinet13 R60_Cabinet14 R60_Cabinet15 R60_Cabinet16 R60_Cabinet17 R60_Cabinet18 R60_Cabinet19 R60_Cabinet20 R60_Cabinet21 R60_Cabinet22 R60_Cabinet23 R60_Cabinet24 R63_Cabinet1 R63_Cabinet2 R63_Cabinet3 R63_Cabinet4 R63_Cabinet5 R63_Cabinet6 R63_Cabinet7 R63_Cabinet8 R63_Cabinet9 R63_Cabinet10 R63_Cabinet11 R63_Cabinet12 R63_Cabinet13 R63_Cabinet14 R63_Cabinet15 R63_Cabinet16 R63_Cabinet17 R63_Cabinet18 R63_Cabinet19 R63_Cabinet20 R63_Cabinet21 R63_Cabinet22 R63_Cabinet23 R63_Cabinet24: library part CMP-1013-00623-1, "10K 0.125W 1% 0805 (2012 Metric)  SMD"
R7: library part RES, "厚膜电阻器 - SMD 1/10watt 100Kohms 1%"
R8 R11 R12 R52 R53: library part RES, "厚膜电阻器 - SMD 1/10watt 22ohms 1%"
R13 R14: library part RES, "厚膜电阻器 - SMD 1/10watt 1.0Kohms 1%"
R15 R16: library part RES, "厚膜电阻器 - SMD 1/10watt 10Kohms 1%"
R26: library part CMP-1013-00849-1, "1M 0.125W 1% 0805 (2012 Metric)  SMD"
R27: library part CMP-1013-00633-1, "12K4 0.125W 1% 0805 (2012 Metric)  SMD"
R28 R42: library part CMP-1013-00026-1, "10R 0.125W 5% 0805 (2012 Metric)  SMD"
R30 R31: library part CMP-1013-00043-1, "51R 0.125W 5% 0805 (2012 Metric)  SMD"
R32 R33: library part CMP-1013-00048-1, "82R 0.125W 5% 0805 (2012 Metric)  SMD"
R34 R35: library part CMP-1013-00060-1, "270R 0.125W 5% 0805 (2012 Metric)  SMD"
R38: library part CMP-1013-00962-1, "10M 0.125W 1% 0805 (2012 Metric)  SMD"
R51: library part RES, "厚膜电阻器 - SMD 1/10watt 300Kohms 1%"
R57: library part RES, "RES"
TP1: library part "Test Point", "Test Point"
U2: library part CMP-1063-00230-1, "5-Line Transient Voltage Suppressor Array, 6-Pin TSOP, Pb-Free, Tape and Reel"
U3: "以太网"
U4: library part "Volt Reg", "LDO Voltage Controllers"
U5: library part CMP-0237-00166-2, "ARM Cortex-M3 32-bit MCU, 512 KB Flash, 64 KB Internal RAM, 80 I/Os, 100-pin LQFP, -40 to 85 degC, Tape and Reel"
U6: "+3V Voltage Monitoring, Low-Cost, 礟 Supervisory Circuit"
U8: "USB2UART"
U9: "SIMPLE SWITCHER?Power Converter 150 KHz 3A Step-Down Voltage Regulator, 5-pin TO-263"
U10: "IC"
U11_Cabinet1 U11_Cabinet2 U11_Cabinet3 U11_Cabinet4 U11_Cabinet5 U11_Cabinet6 U11_Cabinet7 U11_Cabinet8 U11_Cabinet9 U11_Cabinet10 U11_Cabinet11 U11_Cabinet12 U11_Cabinet13 U11_Cabinet14 U11_Cabinet15 U11_Cabinet16 U11_Cabinet17 U11_Cabinet18 U11_Cabinet19 U11_Cabinet20 U11_Cabinet21 U11_Cabinet22 U11_Cabinet23 U11_Cabinet24: library part CMP-1095-00112-1, "PROFET Smart Highside Power Switch, 1 Channel, 10 A Load Current, -40 to 150 degC, PG-TO252-5-11, Reel, Green"
US1: library part D-300-0034, "USB On-The-Go (OTG) Mini-B Receptacle, Right Angle, SMT, 0.80mm (.031\") Pitch, Solder Tabs with Back Cover, Recessed Type"
X1 Y1 Y2 Y3: library part XTAL, "Crystal Oscillator"

## Via types
v1: diameter 30, hole 15, Top Layer to Bottom Layer, 176 vias

## Nets (pads, with @x,y where several pads share a name; then routed paths per layer and width w, separated by ;. In a path a pad name is that pad's centre, name@x,y a point inside that pad or via, vN(x,y) a via of type N, cw(c..) or ccw(c..) an arc to the next point about the centre after c; other vN are vias at no path point)
AVDD: C8.1 C9.1 C10.1 C11.1 C12.1 C13.1 LR1.1 R28.2 R30.2 R31.2 U3.4 U3.8 U3.11 U3.15 U3.17 U3.21 | length 1616.8
  Top Layer w10: R30.2@38456.35,33121.67 R31.2@38531.35,33121.67 ; v1(38570.6,32757.4) C8.1@38620,32757.4 38632.4,32757.4 38644.53,32769.53 38644.53,32772.15 38697.85,32825.47 U3.8@38745.98,32825.47 ; C13.1@38620.43,32572.4 C13.1@38627.4,32572.4 ; C9.1@38622,32947.4 38642.6,32947.4 38685.79,32904.21 U3.4@38745.98,32904.21 ; C12.1@38723.76,32568.64 C12.1@38727.52,32572.4 ; U3.11@38745.98,32766.42 38709.04,32766.42 38696,32753.37 38696,32650 38640,32594 C13.1@38640,32572.4 C12.1@38723.76,32572.4 C12.1@38727.52,32572.4 ; U3.15@38836.54,32695.55 38836.54,32651.54 38810,32625 38780.12,32625 C12.1@38727.52,32572.4 ; U3.17@38875.91,32695.55 38875.91,32640.91 38810.43,32575.43 C11.1@38810.43,32572.4 C12.1@38727.52,32572.4 ; U3.21@38954.65,32695.55 v1(38954.65,32620) 38954.65,32589.43 C10.1@38975.43,32568.64 ; LR1.1@39282.57,32519 LR1.1@39293.57,32530
  Top Layer w20: v1(38401.67,33121.67) R30.2@38456.35,33121.67
  Top Layer w25: C9.1@38622,32947.4 38625,32950.4 v1(38625,32999) R28.2@38625,33049.57 ; C12.1@38723.76,32572.4 v1(38723.76,32636.76) ; 39255,32530 LR1.1@39293.57,32530
  Bottom Layer w10: v1(38954.65,32620) v1@38959,32620
  other v1: 39232,32518 39232,32562
BOOT0: R49.1 R50.2 U5.94 | length 2072
  Top Layer w10: R49.1@38775.43,34485 38906.57,34485 R50.2@38907.57,34484 ; U5.94@40203.11,33975.79 40203.11,34026.11 40244,34067 v1(40244,34124)
  Bottom Layer w10: 38897,34489 38935,34527 39493,34527 39547,34473 39547,34411 39608,34350 39608,34252 39655,34205 39754.37,34205 39798.37,34249 39904.63,34249 39923.63,34268 39976.77,34268 39980.77,34272 40218,34272 40272.88,34217.12 40272.88,34152.88 v1(40244,34124)
BOOT1: R43.2 U5.37 | length 138.4
  Top Layer w10: U5.37@40104.68,34574.21 40104.68,34658.68 40113.43,34667.43 R43.2@40113.43,34709
CAN_N: P3.2 R57.2 U10.6
CAN_P: P3.1 R57.1 U10.7
CAN_RX: U5.95 U10.4 | length 622.1
  Top Layer w10: U5.95@40222.8,33975.79 40222.8,33884.2 40388,33719 40495,33719 40507,33707 40507,33614 40489,33596 U10.4@40434.51,33596
CAN_TX: U5.96 U10.1 | length 335.4
  Top Layer w10: U5.96@40242.48,33975.79 40242.48,33893.52 40390,33746 U10.1@40434.51,33746
CH340_D+: R53.1 U8.5 | length 200.1
  Top Layer w15: R53.1@38055.43,33945 38105.43,33995 38160,33995 38180,34015 U8.5@38180,34061.51
CH340_D-: R51.1 R52.1 U8.6 | length 191.9
  Top Layer w15: U8.6@38230,34055.51 38230,33974.57 R52.1@38200.43,33945 R51.1@38269.57,33945
DGND: R51.2 US1.5 US1.MH1 US1.MH2 US1.MH3 US1.MH4
DTR: R47.1 U8.13 | length 356.9
  Top Layer w10: U8.13@38130,34264.49 38130,34315 38149.5,34334.5 38365.84,34334.5 R47.1@38410,34378.66
EGND: C47_Cabinet1.2 C47_Cabinet2.2 C47_Cabinet3.2 C47_Cabinet4.2 C47_Cabinet5.2 C47_Cabinet6.2 C47_Cabinet7.2 C47_Cabinet8.2 C47_Cabinet9.2 C47_Cabinet10.2 C47_Cabinet11.2 C47_Cabinet12.2 C47_Cabinet13.2 C47_Cabinet14.2 C47_Cabinet15.2 C47_Cabinet16.2 C47_Cabinet17.2 C47_Cabinet18.2 C47_Cabinet19.2 C47_Cabinet20.2 C47_Cabinet21.2 C47_Cabinet22.2 C47_Cabinet23.2 C47_Cabinet24.2 C48_Cabinet1.2 C48_Cabinet2.2 C48_Cabinet3.2 C48_Cabinet4.2 C48_Cabinet5.2 C48_Cabinet6.2 C48_Cabinet7.2 C48_Cabinet8.2 C48_Cabinet9.2 C48_Cabinet10.2 C48_Cabinet11.2 C48_Cabinet12.2 C48_Cabinet13.2 C48_Cabinet14.2 C48_Cabinet15.2 C48_Cabinet16.2 C48_Cabinet17.2 C48_Cabinet18.2 C48_Cabinet19.2 C48_Cabinet20.2 C48_Cabinet21.2 C48_Cabinet22.2 C48_Cabinet23.2 C48_Cabinet24.2 CP5_Cabinet1.2 CP5_Cabinet2.2 CP5_Cabinet3.2 CP5_Cabinet4.2 CP5_Cabinet5.2 CP5_Cabinet6.2 CP5_Cabinet7.2 CP5_Cabinet8.2 CP5_Cabinet9.2 CP5_Cabinet10.2 CP5_Cabinet11.2 CP5_Cabinet12.2 CP5_Cabinet13.2 CP5_Cabinet14.2 CP5_Cabinet15.2 CP5_Cabinet16.2 CP5_Cabinet17.2 CP5_Cabinet18.2 CP5_Cabinet19.2 CP5_Cabinet20.2 CP5_Cabinet21.2 CP5_Cabinet22.2 CP5_Cabinet23.2 CP5_Cabinet24.2 LED6_Cabinet1.2 LED6_Cabinet2.2 LED6_Cabinet3.2 LED6_Cabinet4.2 LED6_Cabinet5.2 LED6_Cabinet6.2 LED6_Cabinet7.2 LED6_Cabinet8.2 LED6_Cabinet9.2 LED6_Cabinet10.2 LED6_Cabinet11.2 LED6_Cabinet12.2 LED6_Cabinet13.2 LED6_Cabinet14.2 LED6_Cabinet15.2 LED6_Cabinet16.2 LED6_Cabinet17.2 LED6_Cabinet18.2 LED6_Cabinet19.2 LED6_Cabinet20.2 LED6_Cabinet21.2 LED6_Cabinet22.2 LED6_Cabinet23.2 LED6_Cabinet24.2 P5_Cabinet1.3 P5_Cabinet2.3 P5_Cabinet3.3 P5_Cabinet4.3 P5_Cabinet5.3 P5_Cabinet6.3 P5_Cabinet7.3 P5_Cabinet8.3 P5_Cabinet9.3 P5_Cabinet10.3 P5_Cabinet11.3 P5_Cabinet12.3 P5_Cabinet13.3 P5_Cabinet14.3 P5_Cabinet15.3 P5_Cabinet16.3 P5_Cabinet17.3 P5_Cabinet18.3 P5_Cabinet19.3 P5_Cabinet20.3 P5_Cabinet21.3 P5_Cabinet22.3 P5_Cabinet23.3 P5_Cabinet24.3 Q6_Cabinet1.2 Q6_Cabinet2.2 Q6_Cabinet3.2 Q6_Cabinet4.2 Q6_Cabinet5.2 Q6_Cabinet6.2 Q6_Cabinet7.2 Q6_Cabinet8.2 Q6_Cabinet9.2 Q6_Cabinet10.2 Q6_Cabinet11.2 Q6_Cabinet12.2 Q6_Cabinet13.2 Q6_Cabinet14.2 Q6_Cabinet15.2 Q6_Cabinet16.2 Q6_Cabinet17.2 Q6_Cabinet18.2 Q6_Cabinet19.2 Q6_Cabinet20.2 Q6_Cabinet21.2 Q6_Cabinet22.2 Q6_Cabinet23.2 Q6_Cabinet24.2 R60_Cabinet1.1 R60_Cabinet2.1 R60_Cabinet3.1 R60_Cabinet4.1 R60_Cabinet5.1 R60_Cabinet6.1 R60_Cabinet7.1 R60_Cabinet8.1 R60_Cabinet9.1 R60_Cabinet10.1 R60_Cabinet11.1 R60_Cabinet12.1 R60_Cabinet13.1 R60_Cabinet14.1 R60_Cabinet15.1 R60_Cabinet16.1 R60_Cabinet17.1 R60_Cabinet18.1 R60_Cabinet19.1 R60_Cabinet20.1 R60_Cabinet21.1 R60_Cabinet22.1 R60_Cabinet23.1 R60_Cabinet24.1 R63_Cabinet1.1 R63_Cabinet2.1 R63_Cabinet3.1 R63_Cabinet4.1 R63_Cabinet5.1 R63_Cabinet6.1 R63_Cabinet7.1 R63_Cabinet8.1 R63_Cabinet9.1 R63_Cabinet10.1 R63_Cabinet11.1 R63_Cabinet12.1 R63_Cabinet13.1 R63_Cabinet14.1 R63_Cabinet15.1 R63_Cabinet16.1 R63_Cabinet17.1 R63_Cabinet18.1 R63_Cabinet19.1 R63_Cabinet20.1 R63_Cabinet21.1 R63_Cabinet22.1 R63_Cabinet23.1 R63_Cabinet24.1 | length 874.8
  Top Layer w20: C48_Cabinet1.2@40219.43,32773.4 v1(40219.43,32822) ; C48_Cabinet2.2@40736.43,32773.4 v1(40736.43,32822) ; v1(40841.57,35305.51) C48_Cabinet9.2@40841.57,35354.11 ; C48_Cabinet3.2@41253.43,32773.4 v1(41253.43,32822) ; v1(41492.57,35308.51) C48_Cabinet10.2@41492.57,35357.11 ; C48_Cabinet4.2@41770.43,32773.4 v1(41770.43,32822) ; v1(41803.51,33987.43) C48_Cabinet7.2@41852.11,33987.43 ; v1(41803.51,34535.43) C48_Cabinet8.2@41852.11,34535.43 ; C48_Cabinet5.2@42287.43,32771.89 v1(42287.43,32820.49) ; v1(42399.57,35306.51) C48_Cabinet11.2@42399.57,35355.11 ; C48_Cabinet6.2@42819.43,32776.89 v1(42819.43,32825.49) ; v1(42988.57,35290.51) C48_Cabinet12.2@42988.57,35339.11 ; v1(44027.51,35124.43) C48_Cabinet17.2@44076.11,35124.43 ; v1(44033.51,34064.43) C48_Cabinet15.2@44082.11,34064.43 ; v1(44036,33463.43) C48_Cabinet14.2@44084.6,33463.43 ; v1(44045.02,32871.2) C48_Cabinet13.2@44093.62,32871.2 ; v1(45477,33997.43) C48_Cabinet21.2@45525.6,33997.43 ; v1(45488.51,33473.43) C48_Cabinet20.2@45537.11,33473.43
GGND: J2.13
GND: C1.2 C2.2 C3.2 C4.2 C5.2 C6.2 C7.2 C8.2 C9.2 C10.2 C11.2 C12.2 C13.2 C14.2 C15.1 C16.1 C17.1 C18.2 C19.1 C22.2 C23.1 C24.2 C25.2 C26.2 C27.2 C28.2 C29.2 C30.2 C31.2 C32.2 C33.2 C34.2 C35.2 C36.2 C37.1 C38.2 C39.2 C40.2 C41.2 C43.2 C44.2 C45.2 C46.2 CP1.2 CP2.2 CP3.2 CP4.2 D6.1 D7.1 J1.5 J1.8 J3.2 J3.2A J3.2B LED1.2 LED2.2 LED3.2 LED4.2 LR6.2 P1.2 P2.4 P4.2 Q1.2 Q2.2 R5.2 R10.2 R15.2 R16.2 R21.1 R22.1 R23.1 R24.1 R25.1 R27.1 R29.2 R43.1 R50.1 R56.2 U1.17 U1.18 U1.29 U1.39 U1.45 U1.46 U1.53 U1.54 U1.58 U1.59 U1.61 U1.62 U1.63 U1.64 U1.65 U2.2 U3.3 U3.9 U3.14 U3.16 U3.19 U3.29 U3.48 U4.1 U5.10 U5.20 U5.27 U5.49 U5.74 U5.99 U6.3 U7.4 U8.1 U9.3 U9.6 U10.2 | length 3940.9
  Top Layer w10: v1(38560.6,32872.6) C9.2@38615,32872.6 ; v1(38576.4,32682.6) C8.2@38620,32682.6 38660.53,32723.13 38660.53,32765.53 38700.79,32805.79 U3.9@38745.98,32805.79 v1(38819.79,32805.79) ; v1(38763.55,33014.45) U3.48@38797.17,33014.45 ; U3.14@38816.85,32695.55 v1(38816.85,32760.85) ; U3.16@38856.22,32695.55 v1(38856.22,32778.22) ; U3.19@38915.28,32695.55 v1(38915.28,32772.28) ; v1(39035,33270) R21.1@39035,33220.43 R21.1@39040.97,33226.4 ; R22.1@39135,33220.43 v1(39135,33272) ; R23.1@39238.87,33221.67 v1(39238.87,33273.13) ; R24.1@39335,33220.43 v1(39335,33274) ; R25.1@39435,33220.43 v1(39435,33273) ; C14.2@39530,33226.4 v1(39530,33272) ; v1(39680,34036) 39702.46,34058.46 U5.74@39785.79,34058.46 ; v1(39868.46,34497.46) U5.49@39868.46,34574.21 ; v1(40263,34341) 40263,34372 40303.8,34412.8 U5.20@40384.21,34412.8 ; U5.99@40301.54,33975.79 v1(40301.54,34041.54) ; U5.27@40301.54,34574.21 40301.54,34626.54 v1(40323,34648) ; v1(40312.06,34215.94) U5.10@40384.21,34215.94
  Top Layer w12: U3.3@38745.98,32923.9 38790.1,32923.9 v1(38815,32899) ; v1(38980.53,32825.47) U3.29@39064.88,32825.47
  Top Layer w20: C40.2@38667,34152.5 38668,34151.5 C39.2@38668,34056.5 ; C37.1@39255,34057.4 ccw(c39297.01,34099.41) 39297.01,34040 U6.3@39375.51,34040 ; C15.1@39278,32653 39278.5,32653.5 C15.1@39285,32653.5 39397,32653.5 ; C45.2@39312.6,33480 v1(39312.6,33533.6) ; v1(39397,32629) 39397,32653.5 ; C16.1@39502,32657.5 39498,32653.5 39397,32653.5 ; C36.2@40119,33494.5 40120,33495.5 40120,33700 40167,33747 U7.4@40199.49,33747 40278.4,33747 C46.2@40320,33705.4 40329.4,33696 U10.2@40434.51,33696
  Top Layer w25: C1.2@37830,34851.48 C2.2@37905,34851.48 ; U1.65@38077.56,34911.06 U1.64@38077.56,34950.43 U1.63@38077.56,34989.8 U1.62@38077.56,35029.17 U1.61@38077.56,35068.54 ; v1(38388.5,32573.5) C23.1@38445,32573.5 38518.94,32573.5 R27.1@38520,32574.57 ; R56.2@38585,33724.57 cw(c38572.93,33712.5) 38590,33712.5 C43.2@38590,33606.3 ; C44.2@38785,33477.4 cw(c38785,33422.84) 38823.58,33461.42 38885.52,33399.48 cw(c38850.58,33364.53) D7.1@38900,33364.53 v1(38900,33309) ; v1(38853,33309) v1(38900,33309) ; v1(38948,33309) v1(38900,33309) ; U9.6@38965,34040.83 v1(38965,34267) ; 39067,35532 U2.2@39143.71,35532 ; v1(39121.4,32662.6) C22.2@39175,32662.6
  Bottom Layer w10: v1@39678,34036 v1(39680,34036) ; v1(40301.54,34041.54) v1@40303,34043
  other v1: 39287.3,33861.3
I2C1_SCL: U5.92 U7.6 | length 527
  Top Layer w10: U7.6@40010.51,33697 39954,33697 39942,33709 39942,33757 39962,33777 40124,33777 40163.74,33816.74 U5.92@40163.74,33975.79
I2C1_SDA: U5.93 U7.5 | length 367.5
  Top Layer w10: U7.5@40010.51,33747 40125,33747 40183.43,33805.43 U5.93@40183.43,33975.79
LED_ACT: J2.10 U3.27 | length 1561.6
  Top Layer w10: v1(39001.1,32786.1) U3.27@39064.88,32786.1
  Bottom Layer w10: J2.10@37742.44,33011.24 37808.76,33011.24 38210,32610 38825,32610 v1(39001.1,32786.1)
LED_LINK: J2.11 U3.25
N\R\S\T\: C32.1 D3.1 R37.1 R40.2 U5.14 | length 2401.1
  Top Layer w10: D3.1@39006.93,34375 39471,34375 v1(39507,34339) 39507.43,34339 39540,34306.43 R40.2@39596,34306.43 ; v1(40235,34174) 40235,34196 40333.68,34294.68 U5.14@40384.21,34294.68 40661.68,34294.68 40683,34316 40683,34484 40729,34530 R37.1@40729,34546.57 ; R37.1@40728,34546.57 R37.1@40729,34546.57 ; R37.1@40729,34550.6 R37.1@40729,34546.57 ; C32.1@40839,34553.6 40831.97,34546.57 R37.1@40729,34546.57
  Bottom Layer w10: v1(39507,34339) 39507,34305 39627,34185 39769,34185 39810,34226 39977,34226 39998,34247 40211,34247 40235,34223 v1(40235,34174)
NET_CS: R44.2 U3.32 U5.77 | length 1773.6
  Top Layer w10: U3.32@39064.88,32884.53 39117.08,32884.53 39201.56,32969 39540,32969 39627,33056 v1(39627,33067) ; v1(39853,33898) 39853,33920.67 39865.68,33933.35 39865.68,33973.01 U5.77@39868.46,33975.79 ; v1(39905.43,33365) R44.2@39955,33414.57
  Bottom Layer w10: v1(39627,33067) 39627,33078 v1@39914,33365 ; 39777,33362 39778,33361 ; v1(39853,33898) 39853,33739 39913,33679 v1@39913,33366
NET_INT: R45.2 U3.36 U5.35 | length 2589.6
  Top Layer w10: U3.36@39064.88,32963.27 39096.27,32963.27 39166,33033 39449,33033 v1(39483,33067) ; v1@39851,33365 39870,33384 R45.2@39870,33414.57 ; U5.35@40144.06,34574.21 40144.06,34180.94 v1(40185,34140)
  Bottom Layer w10: v1(39483,33067) 39483,33067.77 39550.62,33135.38 39621.38,33135.38 39851,33365 39810,33406 39810,34041 39932,34163 40162,34163 v1(40185,34140)
  other v1: 39842.43,33365
NET_RST: R42.2 U5.36 | length 1623.9
  Top Layer w10: R42.2@40039,33483.43 40039,33536 v1(40044,33541) ; U5.36@40124.37,34574.21 40124.37,34156.63 40184.5,34096.5 v1@40184.5,34085.5
  Bottom Layer w10: v1(40044,33541) 40044,33815 40021,33838 39901,33838 39885,33854 39885,33952 39857,33980 39857,34057 39939,34139 40142,34139 v1(40190,34091)
NetC1_1: C1.1 P1.1 R1.1 | length 328.2
  Top Layer w25: P1.1@37585,34982.91 37792.73,34982.91 ccw(c37792.73,35037.84) R1.1@37831.57,34999 37831.57,34923.91 C1.1@37830,34922.35